# Altium PCB LIB.PcbDoc
Units mil, origin at the board's own origin, x right, y up, seen from the top; angles counter-clockwise.
Board outline 6000 x 4000 mil, 2 copper layers (Top Layer, Bottom Layer); 8 components, 10 nets, 111 pads, 0 vias.
Unrouted connection lines stored in the file: 17.
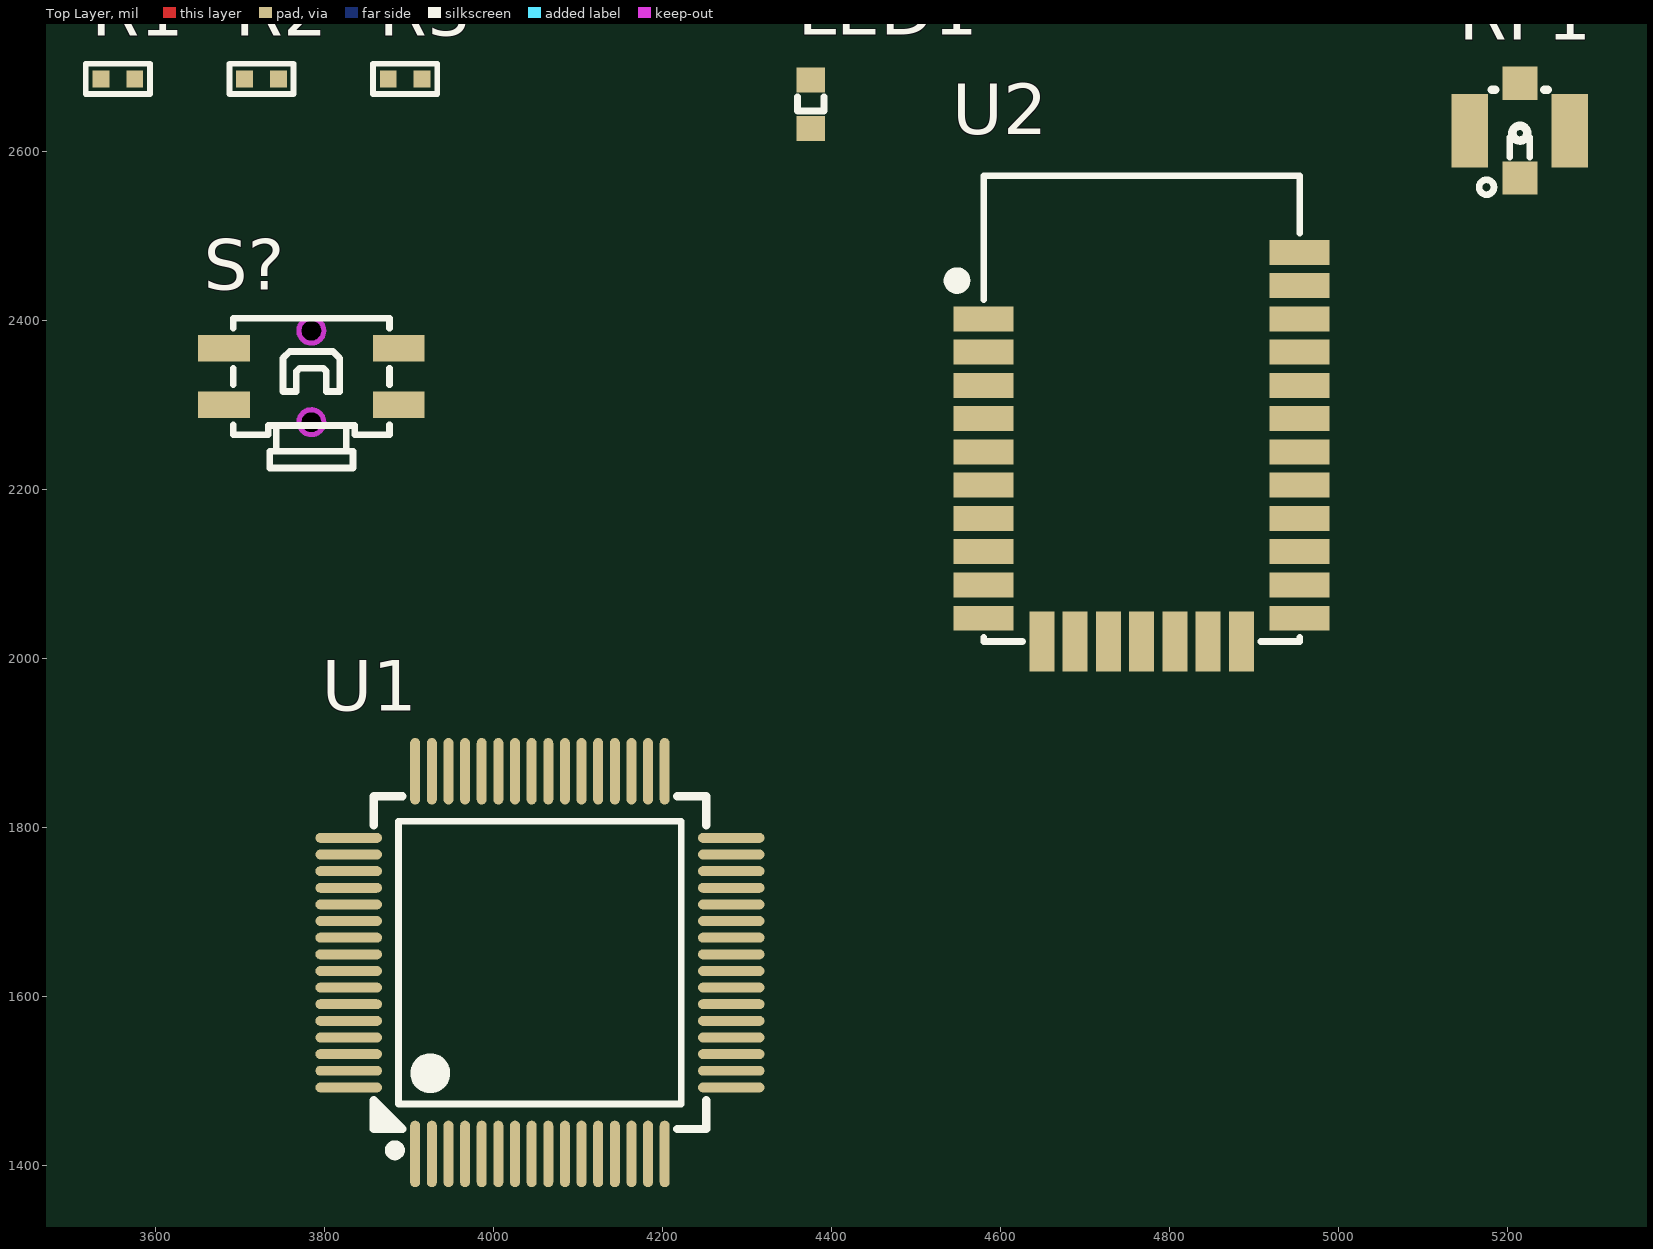
[diagram p0: Top Layer view]
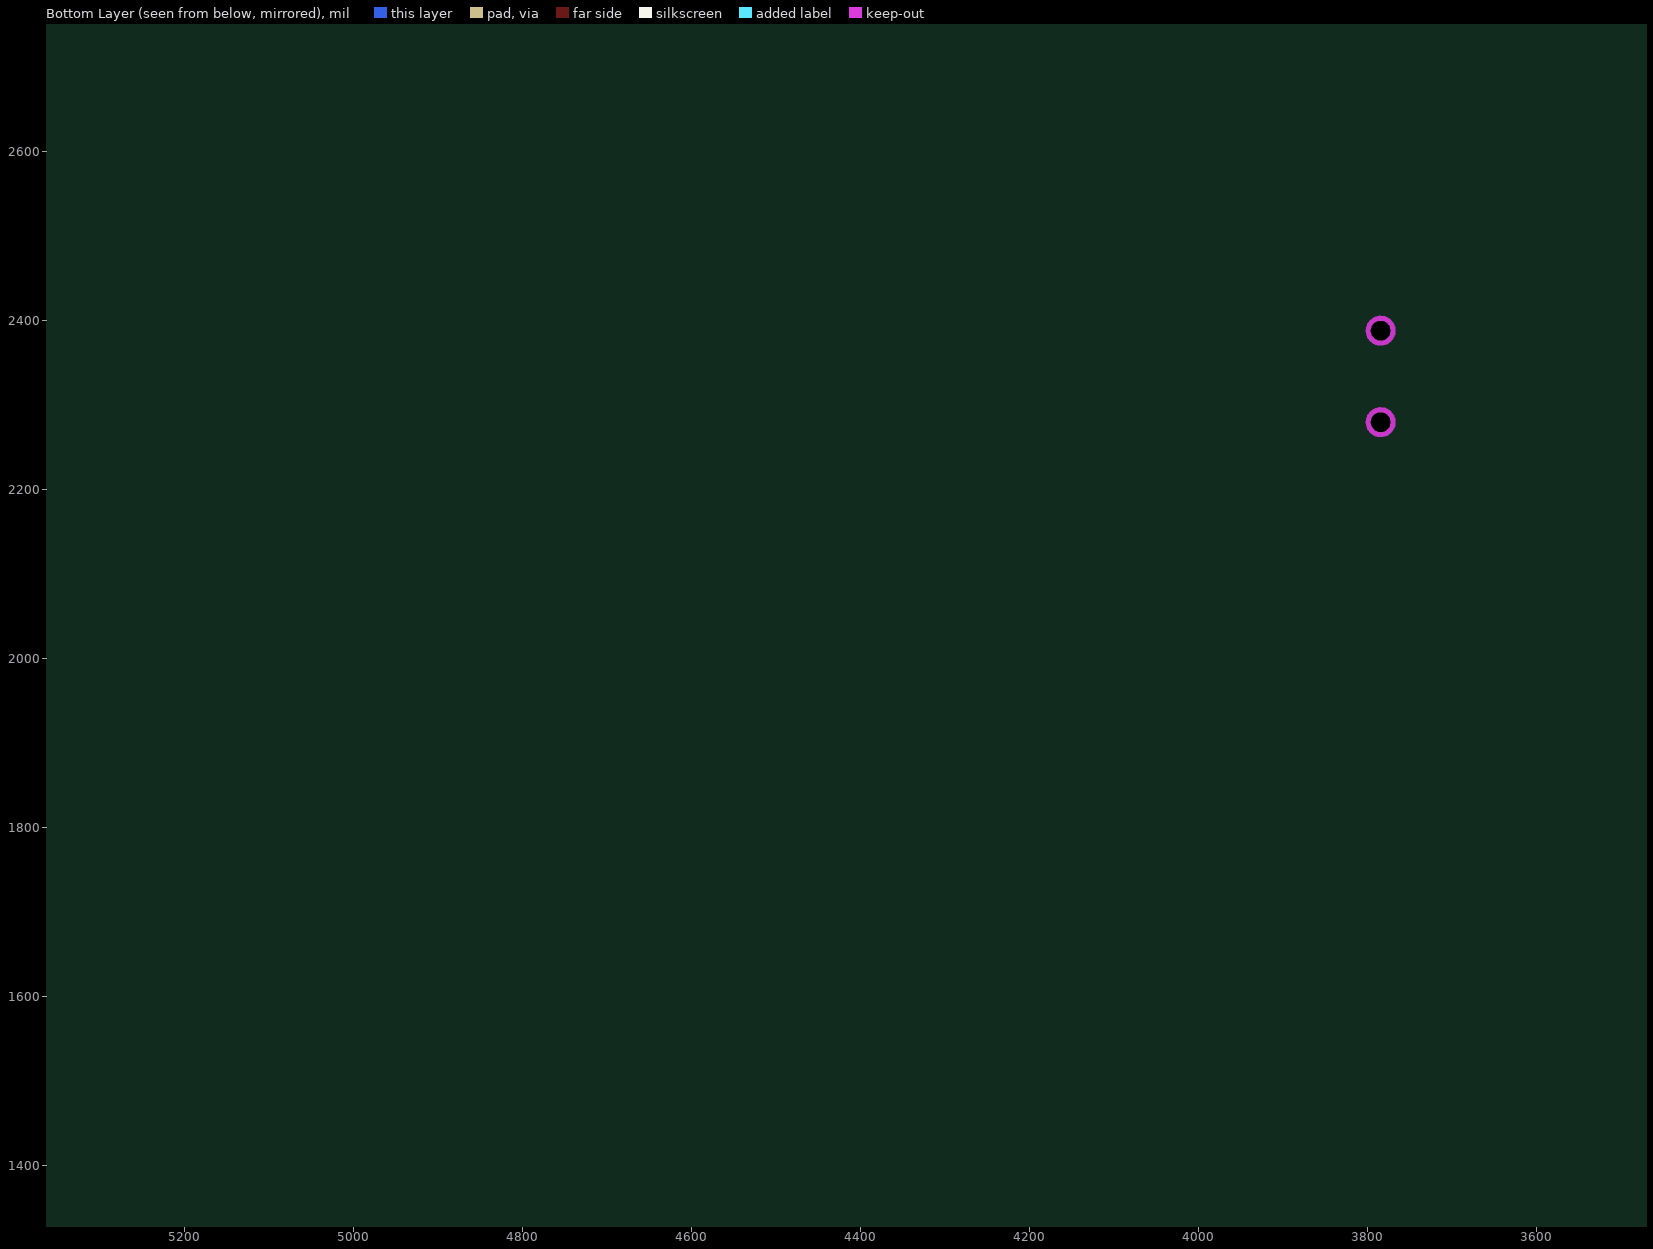
[diagram p1: Bottom Layer view, seen from below]

## Layer stack, top to bottom
Top Solder: solder mask 0.4, Solder Resist, Dk 3.5
Top Layer: signal copper 1.4
Dielectric 1: dielectric 12.6, FR-4, Dk 4.8
Bottom Layer: signal copper 1.4
Bottom Solder: solder mask 0.4, Solder Resist, Dk 3.5

## Board outline
1000,1000 7000,1000 7000,5000 1000,5000

## Design rules (kind name [scope] priority, off if disabled: settings)
Clearance [All] p1: gap=10 ignorepadtopadclearanceinfootprint=FALSE except(0: Arc-Hole Track-Hole SMDPad-Hole THPad-Hole Via-Hole Fill-Hole Poly-Hole Region-Hole Text-Hole)
PolygonConnect [All] p1: connectstyle=Relief reliefconductorwidth=10 reliefentries=4 polygonreliefangle="90 Angle" airgapwidth=10
RoomDefinition LIB [InComponentClass('LIB')] p1: confinementstyle=ConfineIn formatcopy=TRUE lockcomponents=FALSE outline 3505.47,1096.37 5690.47,1096.37 5690.47,2815.74 3505.47,2815.74
RoutingVias [All] p1: holewidth=28 width=50 viastyle="Through Hole" minholewidth=28 minwidth=50 maxholewidth=28 maxwidth=50
SolderMaskExpansion [All] p1: expansion=4 istentingtop=FALSE
Width [All] p1: maxlimit=10 minlimit=10 preferedwidth=10
30 further rules are at their usual default settings.

## Components (designator, comment, footprint, x,y, rotation, side; value= is the part's Value field where it differs from the comment)
LED1 "LED0603" D0603 4375.47,2655.74 r90 top
R1 "10K" R0402 3555.47,2685.74 r0 top
R2 "10K" R0402 3725.47,2685.74 r0 top
R3 "1K" R0402 3895.47,2685.74 r0 top
RF1 "KH-IPEX-K501-29" ANT-SMD_KH-IPEX-K501-29 5214.49,2624.52 r0 top
S? "Turtle" SW-Turtle_TS-015A 3784.49,2333.66 r0 top
U1 "STM32F103R" LQFP-64_L10.0-W10.0-P0.50-LS12.0-BL 4055,1640 r0 top
U2 "HLK-B40" HLK-B40 4580,2401.85 r0 top

## Footprints (in the part's own frame and the unit in brackets; to place one, negate y for a bottom-side part, rotate by r counter-clockwise, add the part's x,y. Pads: shape width x height; smd on the part's side, far side on the other; paste and mask are expansions set on the pad)
ANT-SMD_KH-IPEX-K501-29 [mm]
  rect 1.05x1 smd paste+0 mask+0.051: 1(0,-1.425) 4(0,1.425)
  rect 1.1x2.2 smd paste+0 mask+0.051: 2(-1.5,0) 3(1.5,0)
  silkscreen extent -1.22,-1.92 0.84,1.23
D0603 [mm]
  rect 0.75x0.85 smd: A(0.725,0) K(-0.725,0)
  silkscreen extent -0.2,-0.4 0.22,0.4, body extent -0.85,-0.4 0.85,0.4, height 0.56
HLK-B40 [mm]
  rect 1.8x0.75 smd paste+0 mask+0.05: 1(0,0) 2(0,-1) 3(0,-2) 4(0,-3) 5(0,-4) 6(0,-5) 7(0,-6) 8(0,-7) 9(0,-8) 10(0,-9) 18(9.5,-9) 19(9.5,-8) 20(9.5,-7) 21(9.5,-6) 22(9.5,-5) 23(9.5,-4) 24(9.5,-3) 25(9.5,-2) 26(9.5,-1) 27(9.5,0) 28(9.5,1) 29(9.5,2)
  rect 0.75x1.8 smd paste+0 mask+0.05: 11(1.75,-9.7) 12(2.75,-9.7) 13(3.75,-9.7) 14(4.75,-9.7) 15(5.75,-9.7) 16(6.75,-9.7) 17(7.75,-9.7)
  Multi-Layer pour cut-out: -0.892,1 10.385,1 10.385,4.777 -0.892,4.777 -0.892,1
  silkscreen extent -1,-9.7 9.5,4.3
LQFP-64_L10.0-W10.0-P0.50-LS12.0-BL [mm]
  oval 0.3x2 smd paste+0 mask+0.051: 1(-3.75,-5.75) 2(-3.25,-5.75) 3(-2.75,-5.75) 4(-2.25,-5.75) 5(-1.75,-5.75) 6(-1.25,-5.75) 7(-0.75,-5.75) 8(-0.25,-5.75) 9(0.25,-5.75) 10(0.75,-5.75) 11(1.25,-5.75) 12(1.75,-5.75) 13(2.25,-5.75) 14(2.75,-5.75) 15(3.25,-5.75) 16(3.75,-5.75) 33(3.75,5.75) 34(3.25,5.75) 35(2.75,5.75) 36(2.25,5.75) 37(1.75,5.75) 38(1.25,5.75) 39(0.75,5.75) 40(0.25,5.75) 41(-0.25,5.75) 42(-0.75,5.75) 43(-1.25,5.75) 44(-1.75,5.75) 45(-2.25,5.75) 46(-2.75,5.75) 47(-3.25,5.75) 48(-3.75,5.75)
  oval 2x0.3 smd paste+0 mask+0.051: 17(5.75,-3.75) 18(5.75,-3.25) 19(5.75,-2.75) 20(5.75,-2.25) 21(5.75,-1.75) 22(5.75,-1.25) 23(5.75,-0.75) 24(5.75,-0.25) 25(5.75,0.25) 26(5.75,0.75) 27(5.75,1.25) 28(5.75,1.75) 29(5.75,2.25) 30(5.75,2.75) 31(5.75,3.25) 32(5.75,3.75) 49(-5.75,3.75) 50(-5.75,3.25) 51(-5.75,2.75) 52(-5.75,2.25) 53(-5.75,1.75) 54(-5.75,1.25) 55(-5.75,0.75) 56(-5.75,0.25) 57(-5.75,-0.25) 58(-5.75,-0.75) 59(-5.75,-1.25) 60(-5.75,-1.75) 61(-5.75,-2.25) 62(-5.75,-2.75) 63(-5.75,-3.25) 64(-5.75,-3.75)
  silkscreen extent -5,-5.79 5,5
R0402 [mil] "Chip Capacitor, Body 1.0x0.5mm, IPC High Density"
  rect 20x20 smd: 1(-20,0) 2(20,0)
  silkscreen extent -38,-18 38,18, body extent -19,-10 20,10, height 14
SW-Turtle_TS-015A [mm] "3.5*4.7 中乌龟-龟型微动开关"
  rect 1.55x0.8 smd: 1(-2.625,0.85) 1(2.625,0.85) 2(-2.625,-0.85) 2(2.625,-0.85)
  round 0.75 hole 0.75 unplated mask+0.102: " "(0,-1.375) " "(0,1.375)
  Keep-Out Layer circle w0.152: c0,-1.375 r0.375
  Keep-Out Layer circle w0.152: c0,1.375 r0.375
  silkscreen extent -2.35,-2.75 2.35,1.75

## Part data
LED1: "发光颜色"
R1 R2 R3: library part R0402, "阻值,精度,电阻类型"
RF1: "连接器类型:板端;射频系列:IPEX;接口类型:内针;端口数量:1;阻抗:50Ω;频率-最大值:3GHz;样式:-;接口直径:2mm;接口长度/高度:1.25mm;工作温度范围:-40℃~+90℃;", Frequency-Max=3GHz, JLCPCB Part Class=ExtendedPart, LCSC Part Name=IPEX内针1代, Manufacturer=kinghelm(金航标), Operating Temperature Range=-40℃~+90℃, Add into BOM=yes, Connector Type=板端, Convert to PCB=yes, Datasheet=https://atta.szlcsc.com/upload/public/pdf/source/20210317/C411563_B117163D510F1EF8C12FF082F555A034.pdf, Device=KH-IPEX-K501-29, Impedance=50Ω, Interface Diameter=2mm, Interface Length/Height=1.25mm, Interface Type=内针, Manufacturer Part=KH-IPEX-K501-29, Name=KH-IPEX-K501-29, Number of Ports=1, RF Series=IPEX, Style=-, Supplier=LCSC, Supplier Footprint=SMD, Supplier Part=C411563, Symbol=KH-IPEX-K501-29
S?: library part SW-Turtle, "微触开关-龟型"
U2: "HLK-B40蓝牙模块"
U1: Add into BOM=yes, Convert to PCB=yes, Device=STM32F103R, Name=STM32F103R, Symbol=STM32F103R

## Nets (pads, with @x,y where several pads share a name; then routed paths per layer and width w, separated by ;. In a path a pad name is that pad's centre, name@x,y a point inside that pad or via, vN(x,y) a via of type N, cw(c..) or ccw(c..) an arc to the next point about the centre after c; other vN are vias at no path point)
BL_3V3: R3.2 S?.1 U2.9
GND: R2.2 RF1.2 RF1.3 RF1.4 U2.1 U2.10 U2.28
NetLED1_A: LED1.A R3.1
NetLED1_K: LED1.K U2.27
NetR1_1: R1.1 U2.18
NetR1_2: R1.2 U2.11
NetR2_1: R2.1 S?.2 U2.7
NetRF1_1: RF1.1 U2.29
NetU2_23: U2.23
NetU2_24: U2.24
pads on no net: "S?. " U1.1 U1.2 U1.3 U1.4 U1.5 U1.6 U1.7 U1.8 U1.9 U1.10 U1.11 U1.12 U1.13 U1.14 U1.15 U1.16 U1.17 U1.18 U1.19 U1.20 U1.21 U1.22 U1.23 U1.24 U1.25 U1.26 U1.27 U1.28 U1.29 U1.30 U1.31 U1.32 U1.33 U1.34 U1.35 U1.36 U1.37 U1.38 U1.39 U1.40 U1.41 U1.42 U1.43 U1.44 U1.45 U1.46 U1.47 U1.48 U1.49 U1.50 U1.51 U1.52 U1.53 U1.54 U1.55 U1.56 U1.57 U1.58 U1.59 U1.60 U1.61 U1.62 U1.63 U1.64 U2.2 U2.3 U2.4 U2.5 U2.6 U2.8 U2.12 U2.13 U2.14 U2.15 U2.16 U2.17 U2.19 U2.20 U2.21 U2.22 U2.25 U2.26